# Altium PCB rfid_chip_evaluation.PcbDoc
Units mm, origin at the board's own origin, x right, y up, seen from the top; angles counter-clockwise.
Board outline 22.48 x 13.97 mm, 2 copper layers (Top Layer, Bottom Layer); 9 components, 11 nets, 41 pads, 0 vias.
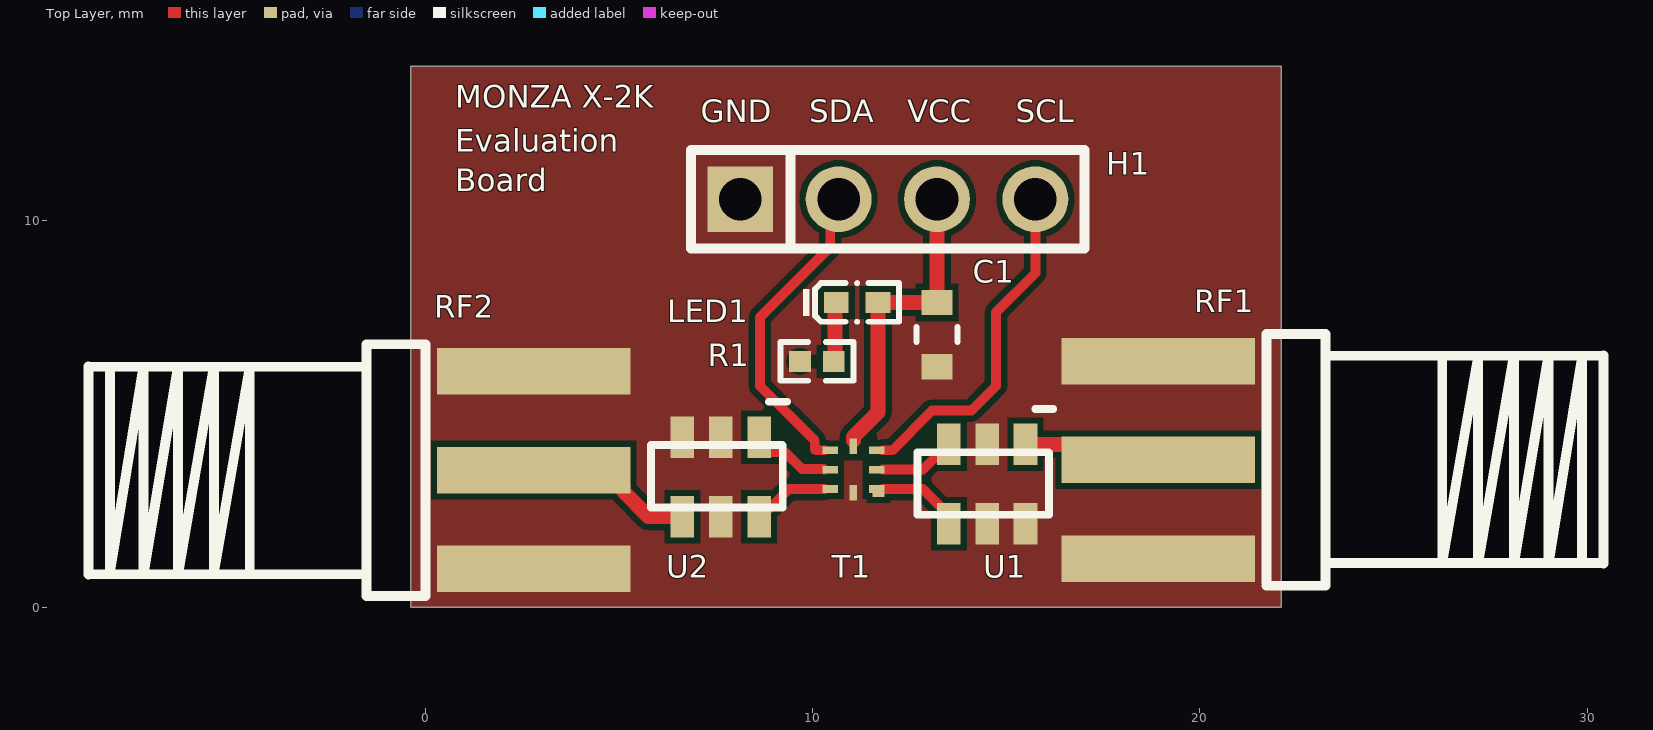
[diagram p0: Top Layer view]
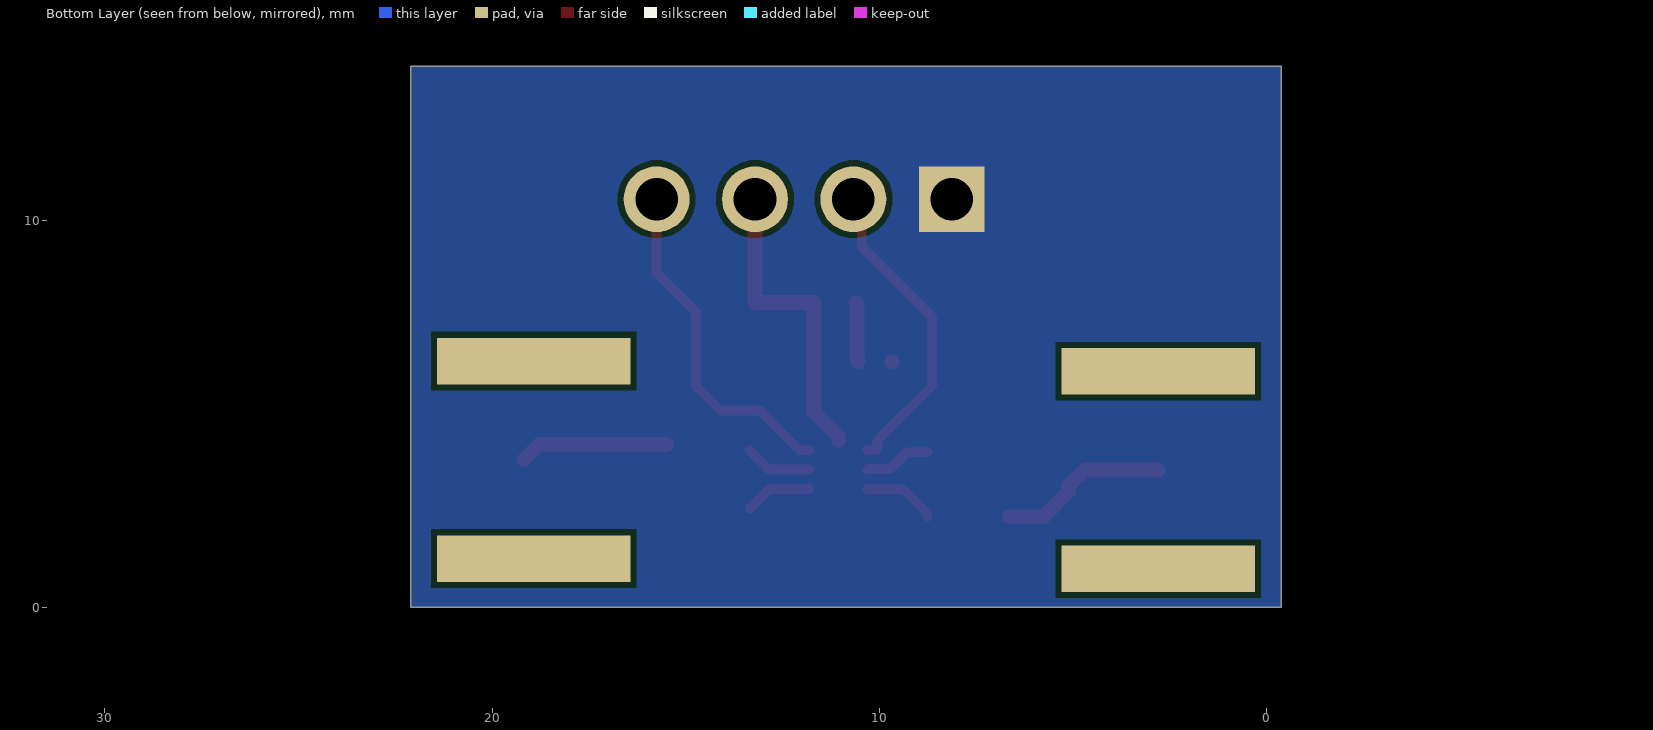
[diagram p1: Bottom Layer view, seen from below]

## Layer stack, top to bottom
Top Solder: solder mask 0.0102, Solder Resist, Dk 3.5
Top Layer: signal copper 0.0356
Dielectric 1: dielectric 0.32, FR-4, Dk 4.8
Bottom Layer: signal copper 0.0356
Bottom Solder: solder mask 0.0102, Solder Resist, Dk 3.5

## Board outline
-0.381,0 -0.381,13.97 22.098,13.97 22.098,0

## Design rules (kind name [scope] priority, off if disabled: settings)
Clearance [All] p1: gap=0.152 ignorepadtopadclearanceinfootprint=TRUE
MinimumSolderMaskSliver [All] p1: minsoldermaskwidth=0
PolygonConnect [All] p1: connectstyle=Direct reliefconductorwidth=0.254 reliefentries=4 polygonreliefangle="90 Angle" airgapwidth=0.254
RoutingVias [All] p1: holewidth=0.711 width=1.27 viastyle="Through Hole" minholewidth=0.711 minwidth=1.27 maxholewidth=0.711 maxwidth=1.27
SilkToSolderMaskClearance [IsPad] p1: minsilkscreentomaskgap=0 clearancetoexposedcopper=TRUE
SolderMaskExpansion [All] p1: expansion=0.102 istentingtop=FALSE
Width [All] p1: maxlimit=0.508 minlimit=0.254 preferedwidth=0.381
28 further rules are at their usual default settings.

## Components (designator, comment, footprint, x,y, rotation, side; value= is the part's Value field where it differs from the comment)
C1 "CL10A106KP8NNNC" CAP_CL10_SAM 13.208,7.046 r270 top value=10uF
H1 "PZ254V-11-04P_C492403" HDR-TH_4P-P2.54-V-M 11.938,10.541 r0 top
LED1 "XL-1005UGC" LED0402-RD_GREEN 11.146,7.874 r0 top
R1 "1k" R0402 10.108,6.35 r0 top value=1.21kΩ
RF1 "BWSMA-KE-P001" SMA-SMD_BWSMA-KE-P001 18.923,3.81 r0 top
RF2 "BWSMA-KE-P001" SMA-SMD_BWSMA-KE-P001 2.794,3.546 r180 top
T1 "Impinj MONZA X-2K" IPJX2K 11.049,3.556 r180 top
U1 "TCN2-14+" FV1206-1 14.504,3.195 r180 top
U2 "TCN2-14+" FV1206-1 7.624,3.379 r180 top

## Footprints (in the part's own frame and the unit in brackets; to place one, negate y for a bottom-side part, rotate by r counter-clockwise, add the part's x,y. Pads: shape width x height; smd on the part's side, far side on the other; paste and mask are expansions set on the pad)
CAP_CL10_SAM [mm]
  rect 0.656x0.8 smd paste+0 mask+0: 1(-0.828,0) 2(0.828,0)
  silkscreen extent -0.19,-0.53 0.19,0.53, body extent -0.8,-0.4 0.8,0.4, height 0.9
FV1206-1 [mm]
  rect 0.61x1.07 smd: 1(-0.99,-1.014) 2(0,-1.014) 3(0.99,-1.014) 4(0.99,1.036) 5(0,1.036) 6(-0.99,1.036)
  silkscreen extent -1.71,-1.93 1.8,0.8, body extent -1.5,-0.76 1.7,0.84, height 0.94
HDR-TH_4P-P2.54-V-M [mm]
  rect 1.7x1.7 hole 1.1 paste+0 mask+0.051: 1(-3.81,0)
  round 1.7 hole 1.1 paste+0 mask+0.051: 2(-1.27,0) 3(1.27,0) 4(3.81,0)
  silkscreen extent -5.08,-1.27 5.08,1.27
IPJX2K [mm]
  rect 0.3x0.104 smd mask+0.05: 1(-0.65,0.65)
  rect 0.4x0.2 smd mask+0.05: 1(-0.6,0.5) 2(-0.6,0) 3(-0.6,-0.5) 5(0.6,-0.5) 6(0.6,0) 7(0.6,0.5)
  rect 0.2x0.4 smd mask+0.05: 4(0,-0.6) 8(0,0.6)
  body extent -0.8,-0.8 0.8,0.8, height 0.5
LED0402-RD_GREEN [mm]
  rect 0.636x0.54 smd paste-100 mask+0.051: 1(-0.538,0) 2(0.538,0)
  silkscreen extent -1.39,-0.54 1.09,0.54
R0402 [mm]
  rect 0.566x0.54 smd mask+0.051: 1(-0.433,0) 2(0.433,0)
  silkscreen extent -0.94,-0.5 0.94,0.5
SMA-SMD_BWSMA-KE-P001 [mm]
  rect 5x1.2 smd mask+0.051: 1(0,-2.55) 2(0,2.55) 5(0,0)
  rect 5x1.2 smd far side mask+0.051: 3(0,2.55) 4(0,-2.55)
  silkscreen extent 2.79,-3.25 11.5,3.25

## Part data
C1: "10 uF Capacity", Mfr_Name=Samsung, Copyright="Copyright (C) 2023 Ultra Librarian. All rights reserved.", Manufacturer_Part_Number=CL10A106KP8NNNC, RefDes=RefDes, Type=DEV
H1: Color=黑色, Current Rating (Max)=-, JLCPCB Part Class="Extended Part", LCSC Part Name="2.54mm 1x4P 直插 方针", Manufacturer=XFCN(兴飞), Manufacturer Part=PZ254V-11-04P, Operating Temperature Range=-40℃~+105℃, Add into BOM=yes, Circluar Pins/Square Pins=方针, Contact Material=黄铜, Contact Plating=-, Convert to PCB=yes, Datasheet=https://atta.szlcsc.com/upload/public/pdf/source/20200309/C492403_F9F19131791D08044AD4F84F8E751A34.pdf, Device=PZ254V-11-04P_C492403, Insulation Height=2.5mm, Length of End Connection Pin=3mm, Length of Mating Pin=6mm, Mounting Type=直插, Name=PZ254V-11-04P, Number of Pins=4, Number of Rows=单排, Pin Structure=1x4P, Pitch=2.54mm, Row Spacing=-, Supplier=LCSC, Supplier Footprint=直插,P=2.54mm, Supplier Part=C492403, Symbol=PZ254V-11-04P, Voltage Rating (Max)=-
LED1: "正贴发光二极管 翠绿", Color Temperature=-, Emitted Color=翠绿, Forward Current=25mA, JLCPCB Part Class="Extended Part", LCSC Part Name="翠绿 516nm 正贴", Lens Color=无色透明, Manufacturer=XINGLIGHT(成兴光), Operating Temperature=-30℃~+85℃, Power Dissipation=80mW, Add into BOM=yes, Convert to PCB=yes, Datasheet=https://atta.szlcsc.com/upload/public/pdf/source/20221102/FF8D6BC2225363A60A01D46BB802F217.pdf, Device=XL-1005UGC, Dominant Wavelength=516nm, Manufacturer Part=XL-1005UGC, Mounting Sytle=正贴, Name=XL-1005UGC, Peak Wavelength=531nm, Supplier=LCSC, Supplier Footprint=0402, Supplier Part=C2856703, Symbol=XL-1005UGC_C2856703, Viewing Angle=120°
R1: library part RK73H1ETTP1211F, "电阻类型:厚膜电阻;阻值:1.21kΩ;精度:±1%;功率:100mW;温度系数:±100ppm/℃;最大工作电压:75V;工作温度范围:-55℃~+155℃;", JLCPCB Part Class=扩展库, LCSC Part Name="1.21kΩ ±1% 100mW", Manufacturer=KOA, Operating Temperature Range=-55℃~+155℃, Overload Voltage (Max)=75V, Power(Watts)=100mW, Temperature Coefficient=±100ppm/℃, Tolerance=±1%, Add into BOM=yes, Convert to PCB=yes, Datasheet=https://atta.szlcsc.com/upload/public/pdf/source/20180126/C171775_15169517954031308606.pdf, Device=RK73H1ETTP1211F, Manufacturer Part=RK73H1ETTP1211F, Name=1k, Supplier=LCSC, Supplier Footprint=0402, Supplier Part=C171775, Symbol=RK73H1ETTP1211F, Type=厚膜电阻
RF1 RF2: "连接器类型:板端;射频系列:SMA;接口类型:内孔;端口数量:1;阻抗:-;频率-最大值:-;样式:偏脚;接口直径:5.2mm;接口长度/高度:-;工作温度范围:-;", Frequency-Max=-, JLCPCB Part Class=扩展库, LCSC Part Name="SMA 内孔 偏脚", Manufacturer="BAT WIRELESS(蝙蝠无线)", Add into BOM=yes, Connector Type=板端, Convert to PCB=yes, Datasheet=https://atta.szlcsc.com/upload/public/pdf/source/20200416/C496550_06668BF2E3B968EA39F96D17E7156373.pdf, Device=BWSMA-KE-P001, Impedance=-, Interface Diameter=5.2mm, Interface Length/Height=-, Interface Type=内孔, Manufacturer Part=BWSMA-KE-P001, Number of Ports=1, Operating Temperature Range=-, RF Series=SMA, Style=偏脚, Supplier=LCSC, Supplier Footprint=插件, Supplier Part=C496550, Symbol=BWSMA-KE-P001
T1: "Impinj MONZA X-2K RFID tag chip"
U1 U2: "balun 700MHz to 1400MHz 1:1"

## Nets (pads, with @x,y where several pads share a name; then routed paths per layer and width w, separated by ;. In a path a pad name is that pad's centre, name@x,y a point inside that pad or via, vN(x,y) a via of type N, cw(c..) or ccw(c..) an arc to the next point about the centre after c; other vN are vias at no path point)
GND: C1.2 H1.1 R1.1 RF1.1 RF1.2 RF2.1 RF2.2 T1.8 U1.2 U1.5 U1.6 U2.2 U2.3 U2.5 | length 0
  Top Layer w0.381: R1.1@9.663,6.35 R1.1
NetH1_2: H1.2 T1.5 | length 8.1
  Top Layer w0.254: T1.5@10.299,4.056 10.078,4.056 10.051,4.083 10.051,4.304 8.636,5.719 8.636,7.493 10.453,9.31 10.453,10.326 H1.2
NetH1_4: H1.4 T1.3 | length 8.9
  Top Layer w0.254: T1.3@11.799,4.056 12.057,4.056 13.081,5.08 14.097,5.08 14.732,5.715 14.732,7.62 15.748,8.636 H1.4
NetLED1_1: LED1.1 R1.2 | length 1.6
  Top Layer w0.381: R1.2 10.574,6.383 10.574,7.841 LED1.1
NetRF1_5: RF1.5 U1.1 | length 3.8
  Top Layer w0.381: U1.1 18.778,4.209 RF1.5@19.177,3.81
NetRF2_5: RF2.5 U2.4 | length 4.4
  Top Layer w0.381: RF2.5 4.694,3.546 5.103,3.137 5.103,2.997 5.758,2.343 U2.4
NetT1_1: T1.1 U1.4 | length 1.7
  Top Layer w0.254: T1.1@11.811,3.056 12.84,3.056 U1.4@13.343,2.553
NetT1_6: T1.6 U2.1 | length 1.7
  Top Layer w0.254: U2.1@8.755,4.007 9.286,4.007 9.718,3.575 10.28,3.575 T1.6@10.299,3.556
RF1_N: T1.2 U1.3 | length 1.7
  Top Layer w0.254: T1.2@11.799,3.556 12.848,3.556 U1.3@13.343,4.051
RF2_P: T1.7 U2.6 | length 1.9
  Top Layer w0.254: U2.6@8.755,2.343 8.755,2.426 9.385,3.056 T1.7@10.299,3.056
VCC: C1.1 H1.3 LED1.2 T1.4 | length 8
  Top Layer w0.381: T1.4@11.049,4.306 11.049,4.4 11.684,5.035 LED1.2 C1.1 H1.3
pads on no net: RF1.3 RF1.4 RF2.3 RF2.4

## Polygon pours and split planes (outlines as drawn)
GND on Top Layer "GND_L01_P004" (solid, remove dead copper, pour order 4): -0.381,0 -0.381,13.97 22.098,13.97 22.098,0
GND on Bottom Layer "GND_L02_P005" (solid, remove dead copper, pour order 5): -0.381,0 -0.381,13.97 22.098,13.97 22.098,0

## Silkscreen, mask and mechanical layers (free items; w line width, h text height)
Top Overlay:
  text "MONZA X-2K" at 0.762,12.711 h1
  text "GND" at 7.112,12.33 h1
  text "SDA" at 9.906,12.33 h1
  text "VCC" at 12.446,12.33 h1
  text "SCL" at 15.24,12.33 h1
  text "Evaluation" at 0.762,11.567 h1
  text "Board" at 0.762,10.551 h1
Mechanical 1:
  the board outline again, w0.254